# Altium PCB PCB1.PcbDoc
Units mil, origin at the board's own origin, x right, y up, seen from the top; angles counter-clockwise.
Board outline 4313.98 x 4641.73 mil, 2 copper layers (Top Layer, Bottom Layer); 44 components, 46 nets, 171 pads, 44 vias.
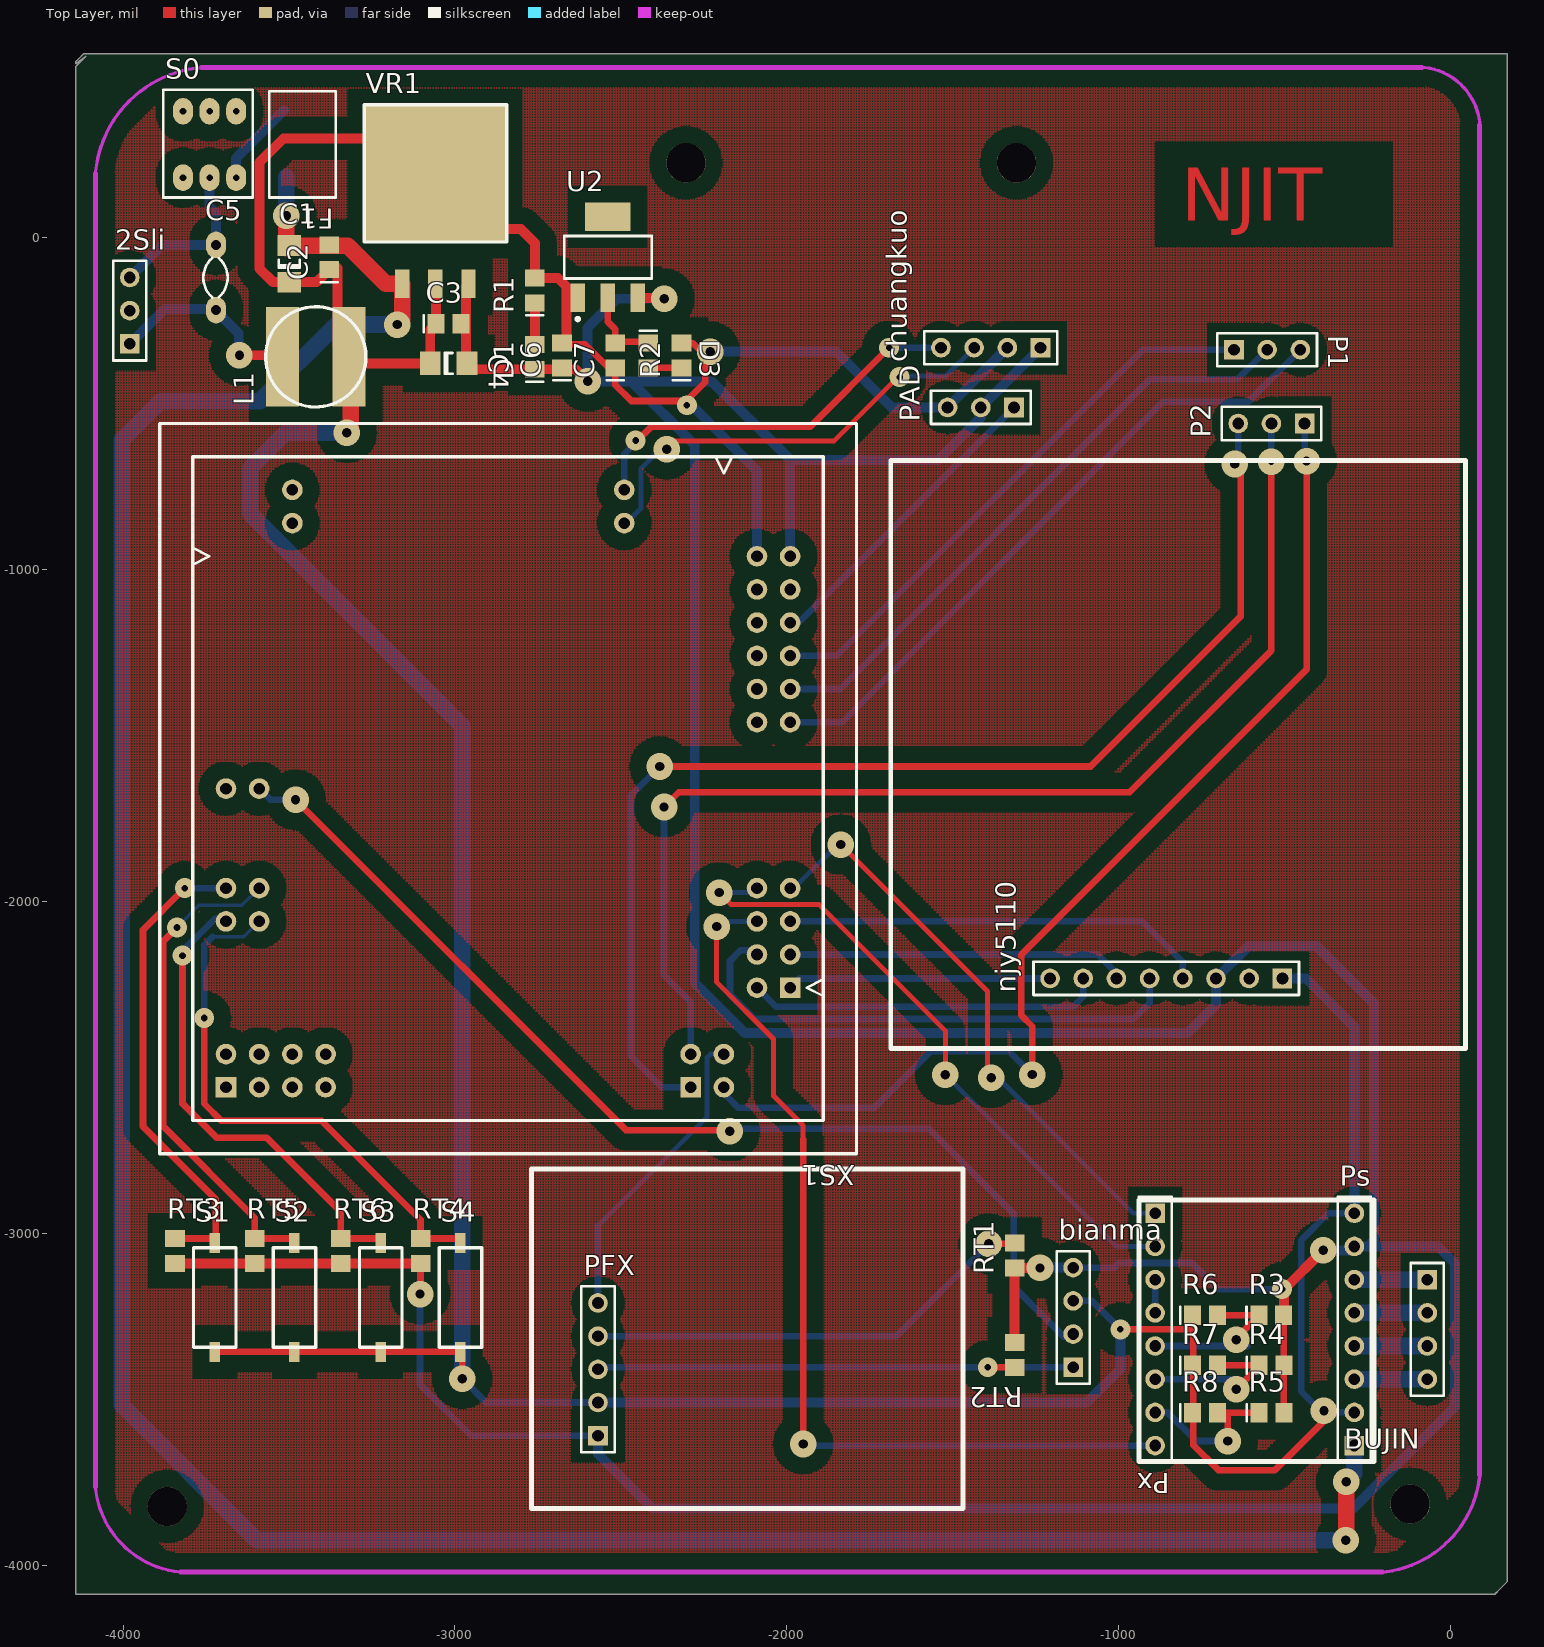
[diagram p0: Top Layer view]
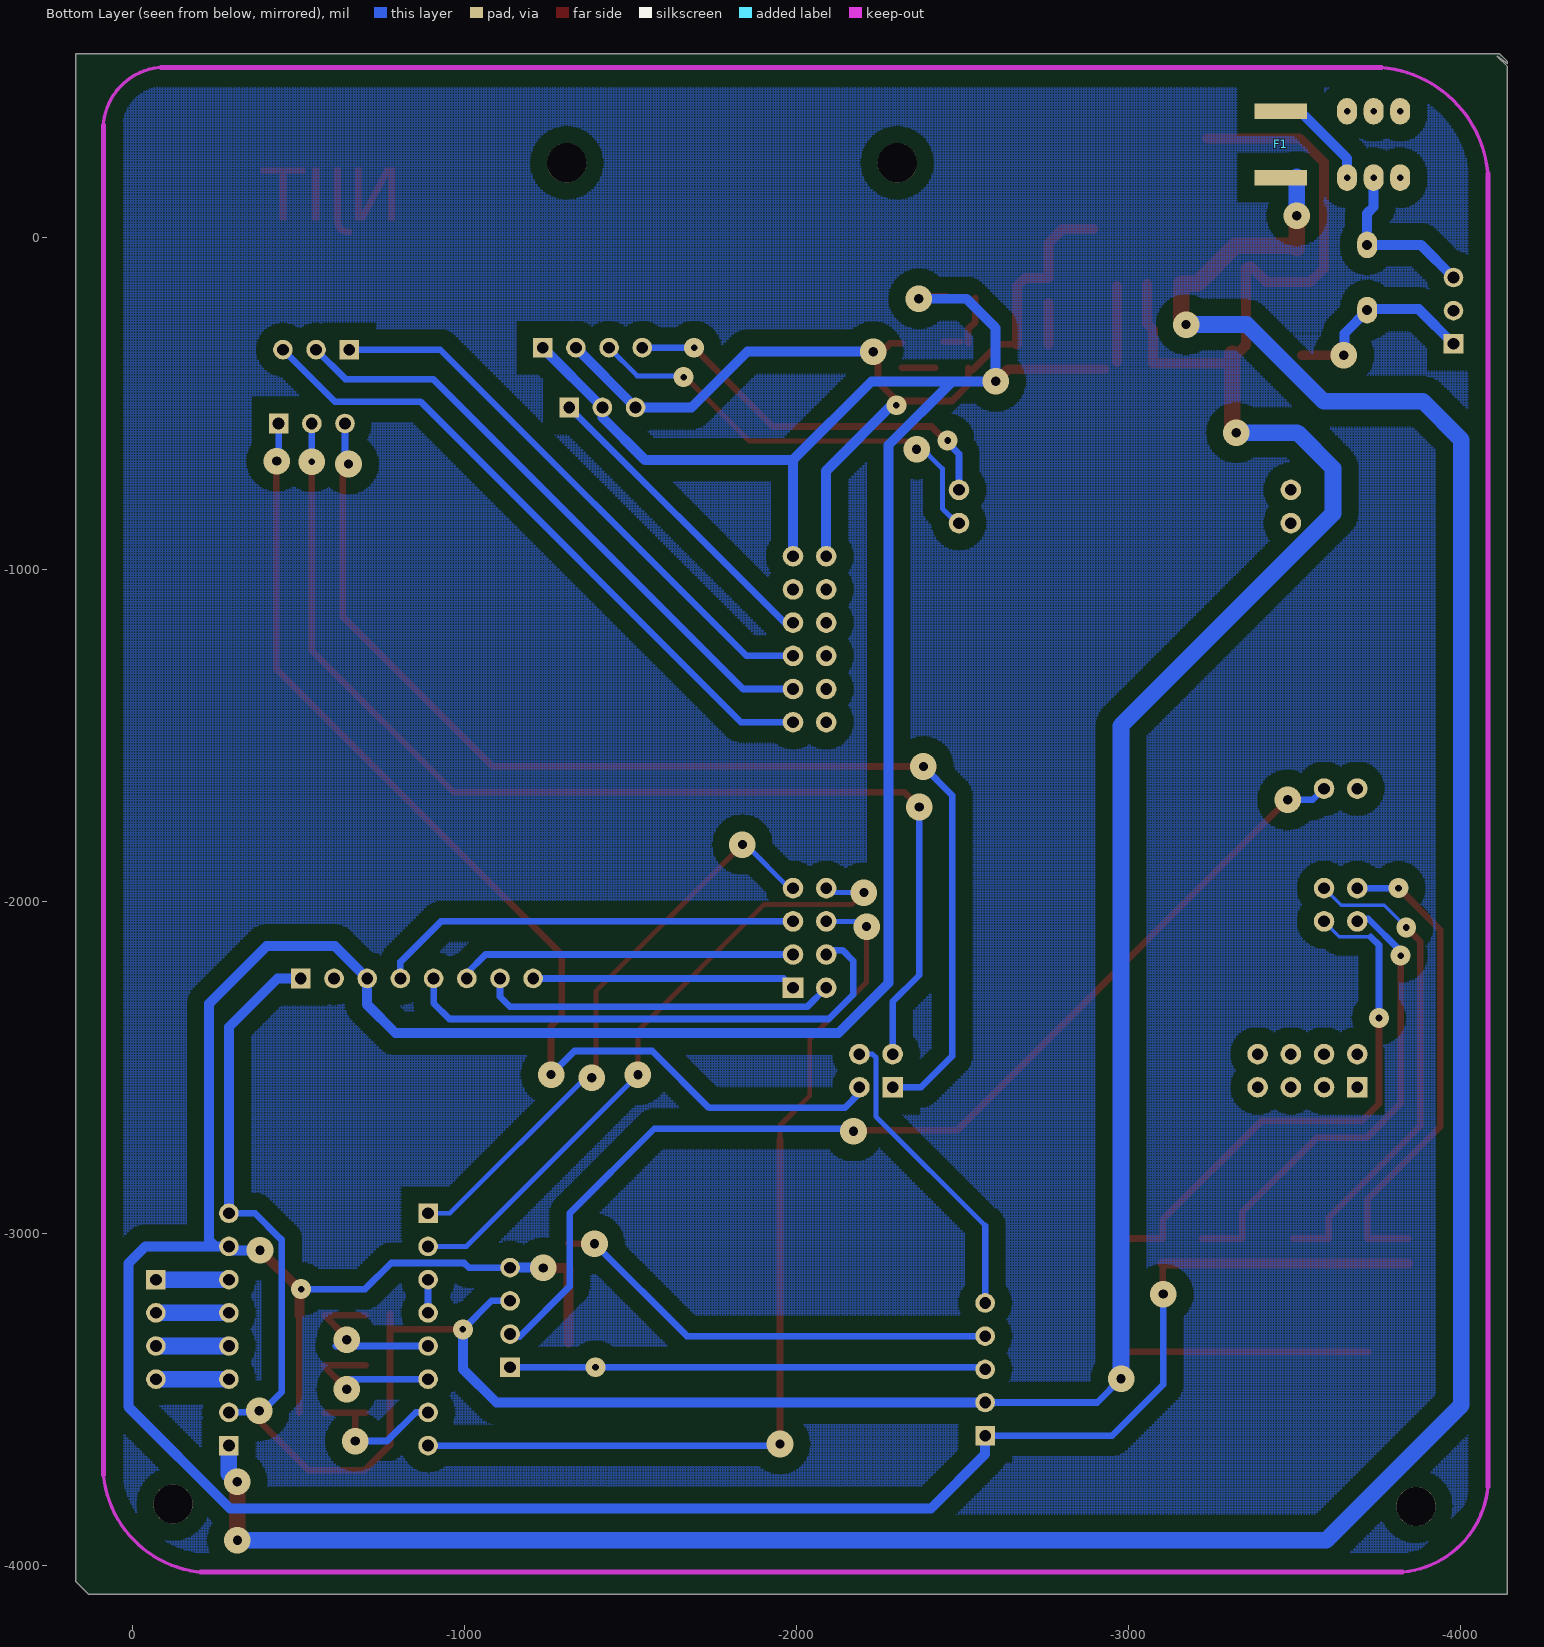
[diagram p1: Bottom Layer view, seen from below]

## Layer stack, top to bottom
Top Layer: signal copper 1.4
Dielectric: dielectric 12.6, FR-4, Dk 4.8
Bottom Layer: signal copper 1.4

## Board outline
-4112.2,546.26 -4142.72,515.75 -4142.72,-4087.6 132.87,-4087.6 148.62,-4071.85 171.26,-4049.21 171.26,554.13 -4119.09,554.13 -4134.84,538.39 -4142.72,530.51 -4142.72,523.62

## Design rules (kind name [scope] priority, off if disabled: settings)
Clearance [All] p1: gap=50
ComponentClearance [All] p1: gap=10 collisioncheckmode=3 verticalgap=10
PolygonConnect [All] p1: connectstyle=Relief reliefconductorwidth=10 reliefentries=4 polygonreliefangle="90 Angle"
RoutingVias [All] p1: holewidth=28 width=80 viastyle="Through Hole" minholewidth=28 minwidth=80 maxholewidth=28 maxwidth=80
SolderMaskExpansion [All] p1: expansion=4
TestPointUsage [All] p1: valid=0 allowmultiple=FALSE
Testpoint [All] p1: side=15 testpointundercomponent=TRUE minsize=40 maxsize=100 preferedsize=60 minholesize=0 maxholesize=40 preferedholesize=32 testpointgrid=1 style=1023 order=0-112345678
Width [All] p1: maxlimit=50 minlimit=10 preferedwidth=20
18 further rules are at their usual default settings.

## Components (designator, comment, footprint, x,y, rotation, side; value= is the part's Value field where it differs from the comment)
2Sli "Header 3" HDR1X3 -3980,-320 r90 top
bianma "Header 4" HDR1X4 -1137.32,-3403.54 r90 top
BUJIN "Header 4" HDR1X4 -70.32,-3139.61 r270 top
C1 "Cap" C1206 -3499.45,-79.13 r90 top
C2 "Cap" C0805 -3379.45,-59.13 r90 top
C3 "Cap" C0805 -3019.45,-259.13 r0 top
C4 "Cap" C1206 -3019.45,-379.13 r0 top
C5 "Cap" C3 -3720,-120 r0 top
C6 "Cap" C0805 -2677.64,-355.08 r90 top
C7 "Cap" C0805 -2517.64,-355.08 r90 top
chuangkuo "Header 4" HDR1X4 -1235.71,-331.65 r180 top
D1 "LED0" C0805 -2759.45,-359.13 r90 top
D3 "LED0" C0805 -2417.64,-355.08 r270 top
F1 "Fuse 1" FUSE -3459.45,380.87 r270 top
L1 "Inductor" L -3419.45,-359.13 r90 top
njy5110 "Header 8" HDR1X8 -507.01,-2232.13 r180 top
P1 "Header 3" HDR1X3 -652.83,-337.56 r0 top
P2 "Header 3" HDR1X3 -440,-560 r180 top
PAD "Header 3" HDR1X3 -1315.71,-511.65 r180 top
PFX "Header 5" HDR1X5 -2569.09,-3609.88 r90 top
Ps "Header 8" HDR1X8 -290.32,-3639.61 r90 top
Px "Header 8" HDR1X8 -890.32,-2939.61 r270 top
R1 "Res2" C0805 -2759.45,-159.13 r90 top
R2 "Res2" C0805 -2317.64,-355.08 r90 top
R3 "Res2" C0805 -540.35,-3247.05 r0 top
R4 "Res2" C0805 -539.88,-3397.68 r0 top
R5 "Res2" C0805 -539.88,-3540.98 r0 top
R6 "Res2" C0805 -740.35,-3247.05 r0 top
R7 "Res2" C0805 -739.88,-3397.68 r0 top
R8 "Res2" C0805 -739.88,-3540.98 r0 top
RT1 "Res Thermal" 6-0805 -1313.46,-3066.89 r90 top
RT2 "Res Thermal" 6-0805 -1313.46,-3366.89 r270 top
RT3 "Res Thermal" 6-0805 -3843.74,-3053.11 r90 top
RT4 "Res Thermal" 6-0805 -3103.74,-3053.11 r90 top
RT5 "Res Thermal" 6-0805 -3603.74,-3053.11 r90 top
RT6 "Res Thermal" 6-0805 -3343.74,-3053.11 r90 top
S0 "SW-SPDT" S4 -3739.45,280.87 r0 top
S1 "SW-PB" S5 -3723.74,-3193.11 r0 top
S2 "SW-PB" S5 -3483.74,-3193.11 r0 top
S3 "SW-PB" S5 -3223.74,-3193.11 r0 top
S4 "SW-PB" S5 -2983.74,-3193.11 r0 top
U2 "AMS1117-3.3" SOT223 -2539.45,-59.13 r0 top
VR1 "LM2940S" LM2940 -3159.45,-139.13 r0 top
XS1 "XS128 112jiao" XS128接口 -2840,-1660 r270 top

## Footprints (in the part's own frame and the unit in brackets; to place one, negate y for a bottom-side part, rotate by r counter-clockwise, add the part's x,y. Pads: shape width x height; smd on the part's side, far side on the other; paste and mask are expansions set on the pad)
6-0805 [mm] "Chip Resistor; Body 2.0 x 1.3 mm (LxW typ)"
  rect 1.3x1.5 smd: 1(-0.95,0) 2(0.95,0)
C3 [mil]
  oval 60x80 hole 30: 1(0,-98.43) 2(0,98.43)
  silkscreen extent -38,-60 35,59
C0805 [mm] "Chip Capacitor; Body 2.0 x 1.2 mm (LxW typ)"
  rect 1.3x1.5 smd: 1(-0.95,0) 2(0.95,0)
  silkscreen extent -1.9,-0.65 -1.9,0.65
C1206 [mm] "Chip Capacitor; Body 3.2 x 1.6 mm (LxW typ)"
  rect 1.6x1.8 smd: 1(-1.4,0) 2(1.4,0)
  silkscreen extent -0.3,-0.8 0.3,0.8
FUSE [mm]
  rect 1.2x4 smd far side: 1(0,0) 2(5.08,0)
  silkscreen extent -1.52,-2.54 6.6,2.54
HDR1X3 [mm] "Connector; Header; 3 Position"
  rect 1.5x1.5 hole 0.9: 1(0,0)
  round 1.5 hole 0.9: 2(2.54,0) 3(5.08,0)
  silkscreen extent -1.27,-1.27 6.35,1.27
HDR1X4 [mm] "Connector; Header; 4 Position"
  rect 1.5x1.5 hole 0.9: 1(0,0)
  round 1.5 hole 0.9: 2(2.54,0) 3(5.08,0) 4(7.62,0)
  silkscreen extent -1.27,-1.27 8.89,1.27
HDR1X5 [mm] "Connector; Header; 5 Position"
  rect 1.5x1.5 hole 0.9: 1(0,0)
  round 1.5 hole 0.9: 2(2.54,0) 3(5.08,0) 4(7.62,0) 5(10.16,0)
  silkscreen extent -1.27,-1.27 11.43,1.27
HDR1X8 [mm] "Connector; Header; 8 Position"
  rect 1.5x1.5 hole 0.9: 1(0,0)
  round 1.5 hole 0.9: 2(2.54,0) 3(5.08,0) 4(7.62,0) 5(10.16,0) 6(12.7,0) 7(15.24,0) 8(17.78,0)
  silkscreen extent -1.27,-1.27 19.05,1.27
L [mil]
  rect 300x100 smd: 1(0,100) 2(0,-100)
  silkscreen extent -151,-151 151,151
LM2940 [mm]
  rect 1.1x2.2 smd: 1(0,0) 2(2.54,0) 3(5.08,0)
  rect 10.8x10.4 smd: 2(2.54,8.42)
  silkscreen extent -2.9,3.2 8,13.7
S4 [mil]
  oval 60x80 hole 20: 1(-80,-100) 2(0,-100) 3(80,-100) 4(80,100) 5(0,100) 6(-80,100)
  silkscreen extent -140,-160 130,165
S5 [mil]
  rect 31.5x60 smd: 1(0,164) 2(0,-164)
  silkscreen extent -64,-150 64,150
SOT223 [mm] "SOT-223/SC-73; 4 Leads; Body 6.7 x 7.3 mm, inc. leads (LxW max)"
  rect 1.1x2.15 smd: 1(-2.3,-3.1) 2(0,-3.1) 3(2.3,-3.1)
  rect 3.5x2.15 smd: 4(0,3.1)
  silkscreen extent -3.35,-4.85 3.35,1.63
XS128接口 [mil]
  round 62 hole 35: 115(0,-850) 116(0,-750) 121(300,-850) 122(300,-750) 123(400,-850) 124(400,-750) 207(-900,350) 208(-800,350) 227(-900,-650) 228(-800,-650) 302(600,750) 303(500,850) 304(500,750) 305(400,850) 306(400,750) 307(300,850) 308(300,750) 317(-200,850) 318(-200,750) 319(-300,850) 320(-300,750) 321(-400,850) 322(-400,750) 323(-500,850) 324(-500,750) 325(-600,850) 326(-600,750) 327(-700,850) 328(-700,750) 402(800,-850) 403(900,-750) 404(800,-750) 405(900,-650) 406(800,-650) 407(900,-550) 408(800,-550) 502(800,550) 503(900,650) 504(800,650)
  rect 62x62 hole 35: 301(600,850) 401(900,-850) 501(900,550)
  silkscreen extent -1100,-1050 1100,1050

## Part data
2Sli P1 P2 PAD: "Header, 3-Pin"
bianma BUJIN chuangkuo: "Header, 4-Pin"
C1 C2 C3 C4 C5 C6 C7: "Capacitor"
D1 D3: "Typical INFRARED GaAs LED"
F1: "2A"
njy5110 Ps Px: "Header, 8-Pin"
PFX: "Header, 5-Pin"
R1 R2 R3 R4 R5 R6 R7 R8: "Resistor"
RT1 RT2 RT3 RT4 RT5 RT6: "Thermistor"
S0: "SPDT Subminiature Toggle Switch, Right Angle Mounting, Vertical Actuation"
S1 S2 S3 S4: "Switch"
VR1: library part "Volt Reg", "Voltage Regulator"

## Free pads (board coordinates)
  round 118.11 hole 118.11: 4(-2304.13,225.39) 5(-1308.07,225.39) 8(-3867.13,-3822.83) 9(-122.05,-3815.94)

## Via types
v1: diameter 80, hole 28, Top Layer to Bottom Layer, 32 vias
v2: diameter 60, hole 20, Top Layer to Bottom Layer, 11 vias
v3: diameter 80, hole 20, Top Layer to Bottom Layer, 1 vias

## Nets (pads, with @x,y where several pads share a name; then routed paths per layer and width w, separated by ;. In a path a pad name is that pad's centre, name@x,y a point inside that pad or via, vN(x,y) a via of type N, cw(c..) or ccw(c..) an arc to the next point about the centre after c; other vN are vias at no path point)
3.3V: C7.2 D3.1 U2.2 | length 195.7
  Top Layer w20: U2.2 -2539.45,-253.86 -2517.64,-275.67 C7.2 ; C7.2@-2494.09,-313.98 D3.1@-2443.9,-313.98
5V: bianma.4 C3.2 C4.2 C6.1 chuangkuo.1 D1.1 njy5110.3 PAD.2 PFX.1 Ps.7 R3.2 R4.2 R5.2 RT1.1 RT2.1 RT3.1 RT4.1 RT5.1 RT6.1 U2.3 VR1.3 XS1.327 | length 14953.1
  Top Layer w20: v1(-3105.32,-3183.07) -3103.74,-3181.5 RT4.1 ; R5.2 R3.2@-502.48,-3247.05
  Top Layer w30: RT3.1 RT4.1 ; C4.2@-2966.54,-374.02 VR1.3@-2966.54,-146.14 ; -2928.54,-396.54 -2636.93,-396.54 v1(-2600.39,-433.07) ; U2.3 -2371.97,-181.18 v1(-2369.09,-184.06) ; RT2.1 RT1.1 v1(-1237.24,-3104.29) ; R3.2@-502.48,-3247.05 -502.48,-3169.8 v1(-383.86,-3051.18)
  Bottom Layer w20: v1(-3105.32,-3183.07) -3105.32,-3455.71 -2951.14,-3609.88 PFX.1 ; bianma.4 -1012.99,-3103.54 -999.02,-3089.57 -779.53,-3089.57 -700.79,-3168.31 v2@-499.02,-3168.31
  Bottom Layer w30: PFX.1 -2569.09,-3665.16 -2405.51,-3828.74 -293.31,-3828.74 12.8,-3522.64 12.8,-3090.55 -38.15,-3039.61 Ps.7 ; -2469.49,-433.07 -2277.56,-625 -2277.56,-2246.06 -2126.97,-2396.65 -792.32,-2396.65 -707.01,-2311.34 njy5110.3 -609.72,-2134.84 -403.54,-2134.84 -230.31,-2308.07 -230.31,-3020.67 -249.25,-3039.61 ; v1(-2369.09,-184.06) -2512.8,-184.06 -2600.39,-271.65 v1(-2600.39,-433.07) -2226.38,-433.07 -1990,-669.45 ; XS1.327 -1990,-669.45 ; v1(-1237.24,-3104.29) -1236.5,-3103.54 bianma.4 ; chuangkuo.1 PAD.2 -1415.71,-541.69 -1543.46,-669.45 -1990,-669.45 ; v1(-383.86,-3051.18) Ps.7@-301.89,-3051.18
  other v2: -507.87,-3168.31
7.2V: 2Sli.3 C5.2 S0.2 | length 523.6
  Bottom Layer w30: 2Sli.3 -3881.65,-21.65 C5.2@-3707.68,-21.65 ; S0.2 -3739.45,92.8 -3720,73.35 C5.2
AD4: P1.3 XS1.317 | length 2002.1
  Bottom Layer w20: XS1.317 -1833.03,-1460 -867.13,-494.09 -609.37,-494.09 P1.3
AD5: P1.2 XS1.319 | length 1860.7
  Bottom Layer w20: XS1.319 -1839.33,-1360 -905.51,-426.18 -641.46,-426.18 P1.2
AD6: P1.1 XS1.321 | length 1730.4
  Bottom Layer w20: XS1.321 -1849.57,-1260 -927.13,-337.56 P1.1 P1.1@-652.83,-348.7
AD7: PAD.1 XS1.323 | length 942.8
  Bottom Layer w20: XS1.323 -1964.06,-1160 PAD.1
DIR: Px.1 XS1.307 | length 1794.3
  Top Layer w15: v1(-1837.6,-1828.74) -1395.67,-2270.67 v1@-1395.67,-2533.46
  Bottom Layer w15: XS1.307 -1977.56,-1972.44 -1991.14,-1972.44 v1@-1836.61,-1817.91 ; v1@-1374.02,-2521.65 -956.06,-2939.61 Px.1
  other v1: -1383.86,-2531.5
EN: Px.8 XS1.306 | length 2857.7
  Top Layer w15: v1(-2211.61,-2075.79) -2211.61,-2243.11 -2040.35,-2414.37 -2040.35,-2585.63 -1950.79,-2675.2 -1950.79,-2717.52
  Top Layer w20: v1(-1950.79,-3634.84) -1950.79,-2717.52
  Bottom Layer w15: v1(-2211.61,-2075.79) -2195.83,-2060 XS1.306
  Bottom Layer w20: v1(-1950.79,-3634.84) -1946.02,-3639.61 Px.8
GND: bianma.3 C1.1 C2.1 C3.1 C4.1 C6.2 C7.1 chuangkuo.2 L1.2 njy5110.1 PAD.3 PFX.2 Ps.2 Ps.8 R1.2 R2.2 R6.1 R7.1 R8.1 S1.2 S2.2 S3.2 S4.2 U2.1 VR1.2 XS1.328 | length 14122.4
  Top Layer w20: S1.2 S4.2 -2978.35,-3362.5 v1(-2978.35,-3437.99) ; C6.2@-2664.37,-321.73 -2607.4,-321.73 C7.1@-2530.51,-398.62 ; C7.1 -2517.64,-442.99 -2468.5,-492.13 -2303.15,-492.13 -2246.06,-435.04 -2246.06,-355.31 -2283.7,-317.68 R2.2 ; v2(-995.08,-3289.37) -789.37,-3289.37 -788.39,-3288.39 -775.59,-3288.39 ; R6.1@-775.59,-3243.11 -775.59,-3637.8 -699.8,-3713.58 -529.53,-3713.58 -354.33,-3538.39 v1@-356.3,-3538.39
  Top Layer w30: L1.2 -3354.33,-324.25 -3354.33,-90.79 -3368.03,-85.12 -3417.17,-134.25 -3547.83,-134.25 -3589.57,-92.52 -3589.57,226.38 -3516.73,299.21 VR1.2@-3237.2,299.21 ; L1.2@-3311.81,-379.13 C4.1 -3074.57,-276.85 C3.1 VR1.2@-3056.85,-139.13 ; VR1.2@-2895.67,25.59 -2801.18,25.59 -2759.45,-16.14 R1.2 -2689.45,-121.73 -2664.37,-146.81 C6.2@-2664.37,-321.73
  Top Layer w50: v1(-3325.79,-587.6) -3313.98,-575.79 L1.2@-3313.98,-350.39
  Bottom Layer w20: v1(-2978.35,-3437.99) -2906.46,-3509.88 PFX.2 ; bianma.3 -1080.91,-3203.54 v2(-995.08,-3289.37) ; v1(-381.89,-3534.45) -392.72,-3534.45 -449.8,-3477.36 -449.8,-3019.68 -443.9,-3013.78 -442.91,-3013.78 -368.74,-2939.61 Ps.8 ; v1@-356.3,-3538.39 -355.08,-3539.61 Ps.2
  Bottom Layer w30: PFX.2 -1096.5,-3509.88 -995.08,-3408.46 v2(-995.08,-3289.37) ; v2@-2298.23,-494.09 -2090,-702.32 XS1.328 ; v1(-2231.3,-343.5) -1852.36,-343.5 -1684.21,-511.65 PAD.3 chuangkuo.2 ; njy5110.1 -436.18,-2232.13 -290.32,-2377.99 Ps.8
  Bottom Layer w50: v1(-3325.79,-587.6) -3509.84,-587.6 -3617.13,-694.88 -3617.13,-831.69 -2978.35,-1470.47 v1(-2978.35,-3437.99)
  other v2: -2301.18,-504.92
INA: bianma.1 PFX.3 RT2.2 | length 1514.9
  Top Layer w20: v2(-1394.69,-3403.54) RT2.2@-1314.21,-3403.54
  Bottom Layer w20: PFX.3 -2562.76,-3403.54 bianma.1
INB: PFX.4 RT1.2 | length 1371.8
  Top Layer w20: v1(-1391.73,-3031.5) -1315.47,-3031.5 RT1.2
  Bottom Layer w20: PFX.4 -1670.12,-3309.88 v1(-1391.73,-3031.5)
MIS1: Px.5 R3.1 R6.2 | length 524
  Top Layer w20: R6.2 R3.1 -645.71,-3315 v1@-645.71,-3339.61
  Bottom Layer w20: Px.5 v1@-612.24,-3339.61
  other v1: -645.71,-3320.87
MIS2: Px.6 R4.1 R7.2 | length 514.5
  Top Layer w20: R7.2 R4.1 ; v1(-645.67,-3469.49) R4.1@-575.79,-3399.61
  Bottom Layer w20: Px.6 v1@-642.09,-3439.61 ; -675.55,-3439.61 v1(-645.67,-3469.49)
MIS3: Px.7 R5.1 R8.2 | length 466
  Top Layer w20: R8.2 R5.1 ; -671.26,-3543.23 v1(-671.26,-3625.98) v1@-669.02,-3623.74
  Bottom Layer w20: Px.7 -853.11,-3539.61 -766.73,-3625.98 v1(-671.26,-3625.98)
NetBUJIN_1: BUJIN.1 Ps.6 | length 220
  Bottom Layer w50: Ps.6 BUJIN.1
NetBUJIN_2: BUJIN.2 Ps.5 | length 220
  Bottom Layer w50: Ps.5 BUJIN.2
NetBUJIN_3: BUJIN.3 Ps.4 | length 220
  Bottom Layer w50: Ps.4 BUJIN.3
NetBUJIN_4: BUJIN.4 Ps.3 | length 220
  Bottom Layer w50: Ps.3 BUJIN.4
NetD1_2: D1.2 R1.1 | length 125.2
  Top Layer w30: D1.2 R1.1
NetD3_2: D3.2 R2.1 | length 100
  Top Layer w20: D3.2 R2.1
NetF1_1: F1.1 S0.3 | length 262.9
  Bottom Layer w30: S0.3 -3659.45,239.17 F1.1@-3514.76,383.86
NetPx_3: Px.3 Px.4 | length 100
  Bottom Layer w20: Px.4 Px.3
PA0: njy5110.8 XS1.301 | length 794.5
  Bottom Layer w20: XS1.301 -1962.13,-2232.13 njy5110.8
PA1: njy5110.7 XS1.302 | length 1074.7
  Bottom Layer w20: XS1.302 -2032.09,-2317.91 -1137.8,-2317.91 -1107.01,-2287.13 njy5110.7
PA2: njy5110.6 XS1.303 | length 1022.1
  Bottom Layer w20: XS1.303 -1063.43,-2160 -1007.01,-2216.42 njy5110.6
PA3: njy5110.5 XS1.304 | length 1585.6
  Bottom Layer w20: XS1.304@-2089.57,-2146.65 -2138.78,-2146.65 -2171.26,-2179.13 -2171.26,-2280.51 -2097.44,-2354.33 -954.72,-2354.33 -907.01,-2306.61 njy5110.5
PA4: njy5110.4 XS1.305 | length 1283.6
  Bottom Layer w20: XS1.305 -929.17,-2060 -807.01,-2182.17 njy5110.4
PB0: RT3.2 S1.1 XS1.121 | length 1446.3
  Top Layer w20: RT3.2 -3720.43,-3015.71 -3720.43,-2897.68 -3939.96,-2678.15 -3939.96,-2085.63 v2(-3814.33,-1960)
  Bottom Layer w20: v2(-3814.33,-1960) XS1.121
PB1: RT5.2 S2.1 XS1.122 | length 1469.1
  Top Layer w20: v2(-3837.6,-2078.74) -3879.92,-2121.06 -3879.92,-2677.17 -3603.74,-2953.35 RT5.2 S2.1@-3497.14,-3015.71
  Bottom Layer w10: v2@-3835.63,-2075.79 -3771.65,-2011.81 -3641.81,-2011.81 XS1.122
PB2: RT6.2 S3.1 XS1.123 | length 1442.5
  Top Layer w20: v2@-3820.87,-2149.61 -3820.87,-2609.25 -3717.52,-2712.6 -3566.93,-2712.6 -3343.74,-2935.79 RT6.2 S3.1@-3222.48,-3015.71
  Bottom Layer w20: v2@-3820.87,-2149.61 -3723.43,-2052.17 XS1.123@-3691.93,-2052.17
  other v2: -3820.87,-2163.39
PB3: RT4.2 S4.1 XS1.124 | length 1643.8
  Top Layer w20: v2(-3755.43,-2351.38) -3755.43,-2609.72 -3703.74,-2661.42 -3401.57,-2661.42 -3103.74,-2959.25 RT4.2 S4.1@-2986.18,-3015.71
  Bottom Layer w10: -3730.31,-2106.3 -3636.3,-2106.3 XS1.124
  Bottom Layer w20: v2(-3755.43,-2351.38) -3755.43,-2131.42 -3730.31,-2106.3
PGND: 2Sli.1 C5.1 L1.1 | length 594
  Top Layer w30: v1(-3649.61,-354.33) L1.1@-3524.25,-354.33
  Bottom Layer w30: 2Sli.1 -3875.55,-215.55 -3724.41,-215.55 -3651.57,-288.39 -3651.57,-352.36 v1(-3649.61,-354.33)
PH0: PFX.5 XS1.504 | length 930.2
  Bottom Layer w15: -2569.09,-2977.56 -2240.16,-2648.62 -2240.16,-2470.47 -2229.69,-2460 XS1.504
  Bottom Layer w20: PFX.5 -2569.09,-2977.56
PH1: P2.1 XS1.503 | length 3420.2
  Top Layer w20: v1(-1260.83,-2521.65) -1260.83,-2375.98 -1293.31,-2343.5 -1293.31,-2160.43 -433.07,-1300.2 -433.07,-708.66 v1@-408.46,-684.06
  Bottom Layer w20: XS1.503 -2190,-2577.72 -2145.67,-2622.05 -1737.2,-2622.05 -1565.94,-2450.79 -1331.69,-2450.79 v1(-1260.83,-2521.65) ; P2.1 -440,-652.52 v1@-408.46,-684.06
  other v1: -434.06,-673.23
PH2: P2.2 XS1.502 | length 3496.1
  Top Layer w20: v1(-2370.08,-1715.55) -2325.79,-1671.26 -967.52,-1671.26 -540,-1243.74 v3(-540,-675.2)
  Bottom Layer w20: v1(-2370.08,-1715.55) -2370.08,-2222.44 -2290,-2302.52 XS1.502 ; v3@-540,-684.41 P2.2
PH3: P2.3 XS1.501 | length 3648.9
  Top Layer w20: v1(-2382.87,-1593.5) -1084.65,-1593.5 -632.87,-1141.73 v1@-632.87,-672.24
  Bottom Layer w20: v1(-2382.87,-1593.5) -2469.49,-1680.12 -2469.49,-2466.54 -2376.02,-2560 XS1.501 ; P2.3 -640,-665.12 v1@-632.87,-672.24
  other v1: -650.59,-682.09
PP5: XS1.227
PP7: 
PS0: chuangkuo.3 XS1.208 | length 1371.3
  Top Layer w15: v1(-2362.2,-637.8) -2336.61,-612.2 -1857.28,-612.2 v2@-1661.42,-416.34
  Bottom Layer w15: XS1.208@-2484.02,-860 -2439.96,-815.94 -2439.96,-695.87 -2362.2,-618.11 v1(-2362.2,-637.8) ; v2@-1661.42,-416.34 -1520.39,-416.34 chuangkuo.3
  Bottom Layer w20: XS1.208 XS1.208@-2484.02,-860
  other v2: -1660.43,-420.28
PS1: chuangkuo.4 XS1.207 | length 1201
  Top Layer w20: v2@-2459.15,-620.57 -2407.48,-568.9 -1929.13,-568.9 v2(-1691.89,-331.65)
  Bottom Layer w20: XS1.207 -2490,-651.42 v2@-2455.13,-616.55 ; v2(-1691.89,-331.65) chuangkuo.4
  other v2: -2455.71,-611.22
PS2: 
PS3: 
PT7: bianma.2 XS1.116 | length 3302
  Top Layer w20: v1(-3480.32,-1693.9) -2485.24,-2688.98 -2197.83,-2688.98 v1@-2174.21,-2665.35
  Bottom Layer w20: XS1.116 -3556.1,-1693.9 v1(-3480.32,-1693.9) ; v1@-2174.21,-2665.35 -2154.53,-2685.04 -1571.85,-2685.04 -1316.93,-2939.96 -1316.93,-3160.43 -1166.34,-3311.02 -1137.99,-3311.02 -1130.51,-3303.54 bianma.2
  other v1: -2172.24,-2692.91
STEP: Px.2 XS1.308 | length 1952.2
  Top Layer w15: v1(-2203.74,-1973.43) -2168.31,-2008.86 -1903.54,-2008.86 -1522.64,-2389.76 v1(-1522.64,-2522.64)
  Bottom Layer w15: v1(-2203.74,-1973.43) -2103.43,-1973.43 XS1.308 ; v1(-1522.64,-2522.64) -1005.67,-3039.61 Px.2
V1: C1.2 C2.2 F1.2 Ps.1 VR1.1 | length 8758.7
  Top Layer w50: v1@-3509.84,63.98 v1(-3507.87,65.94) C1.2@-3507.87,-31.5 ; C1.2 -3323.43,-24.02 -3208.31,-139.13 VR1.1 -3159.45,-247.05 v1(-3174.21,-261.81) ; v1@-314.96,-3914.37 v1(-314.96,-3749.02)
  Bottom Layer w50: v1(-3507.87,65.94) F1.2@-3507.87,184.06 ; v1(-3174.21,-261.81) -3357.28,-261.81 -3588.58,-493.11 -3887.8,-493.11 -4003.94,-609.25 -4003.94,-3517.72 -3596.46,-3925.2 v1(-315.94,-3925.2) ; v1(-314.96,-3749.02) -290.32,-3724.37 Ps.1
pads on no net: 2Sli.2 njy5110.2 S0.1 S0.4 S0.5 S0.6 U2.4 XS1.115 XS1.228 XS1.318 XS1.320 XS1.322 XS1.324 XS1.325 XS1.326 XS1.401 XS1.402 XS1.403 XS1.404 XS1.405 XS1.406 XS1.407 XS1.408

## Polygon pours and split planes (outlines as drawn)
no net on Top Layer "TOP GND Net" (hatched 90Degree grid 8 track 4, remove dead copper): -3855.32,-4018.7 -229.33,-4018.7 -227.36,-4020.67 64.96,-3728.35 87.6,-3728.35 87.6,339.57 -85.63,512.8 -3788.39,512.8 -3792.32,508.86 -4089.57,211.61 -4089.57,202.76 -4089.57,-3734.25 -4083.66,-3740.16 -3855.32,-3968.5 -3855.32,-4000.98
no net on Bottom Layer "TOP GND Net" (hatched 90Degree grid 8 track 4, remove dead copper): -3828.74,-4020.67 -216.54,-4020.67 -200.79,-4036.42 95.47,-3740.16 96.46,-3740.16 96.46,319.88 -64.96,481.3 -64.96,527.56 -3810.04,527.56 -3818.9,518.7 -4089.57,248.03 -4089.57,221.46 -4089.57,-3743.11 -4083.66,-3749.02 -3837.6,-3995.08 -3837.6,-4018.7

## Keep-outs
Keep-Out Layer:
  lines w10: -4083.66,-3708.66 ccw(c-3800.2,-3737.2) -3828.74,-4020.67 ; -4083.66,136.81 cw(c-3734.25,163.39) -3760.83,512.8 ; -271.65,-4020.67 ccw(c-236.71,-3696.36) 87.6,-3731.3 ; -77.76,512.8 cw(c-99.9,325.3) 87.6,303.15
  lines w15: -4083.66,-3763.78 -4083.66,192.91 ; -3826.77,-4020.67 -204.72,-4020.67 ; -3763.78,512.8 -85.63,512.8 ; 87.6,-3728.35 87.6,339.57

## Other copper
Top Layer:
  text "NJIT" at -812.01,51.18 h160

## Silkscreen, mask and mechanical layers (free items; w line width, h text height)
Top Overlay:
  lines w15: -2769.09,-3829.88 -1469.88,-3829.88 -1469.88,-2806.26 -2769.09,-2806.26 -2769.09,-3829.88 ; -1687.01,-2443.78 45.28,-2443.78 45.28,-672.13 -1687.01,-672.13 -1687.01,-2443.78 ; -938.98,-3687.01 -230.32,-3687.01 -230.32,-2899.61 -938.98,-2899.61 -938.98,-3687.01